# Altium PCB MASTER.PcbDoc
Units mm, origin at the board's own origin, x right, y up, seen from the top; angles counter-clockwise.
Board outline 65.41 x 68.71 mm, 2 copper layers (Top Layer, Bottom Layer); 58 components, 43 nets, 233 pads, 0 vias.
Unrouted connection lines stored in the file: 136.
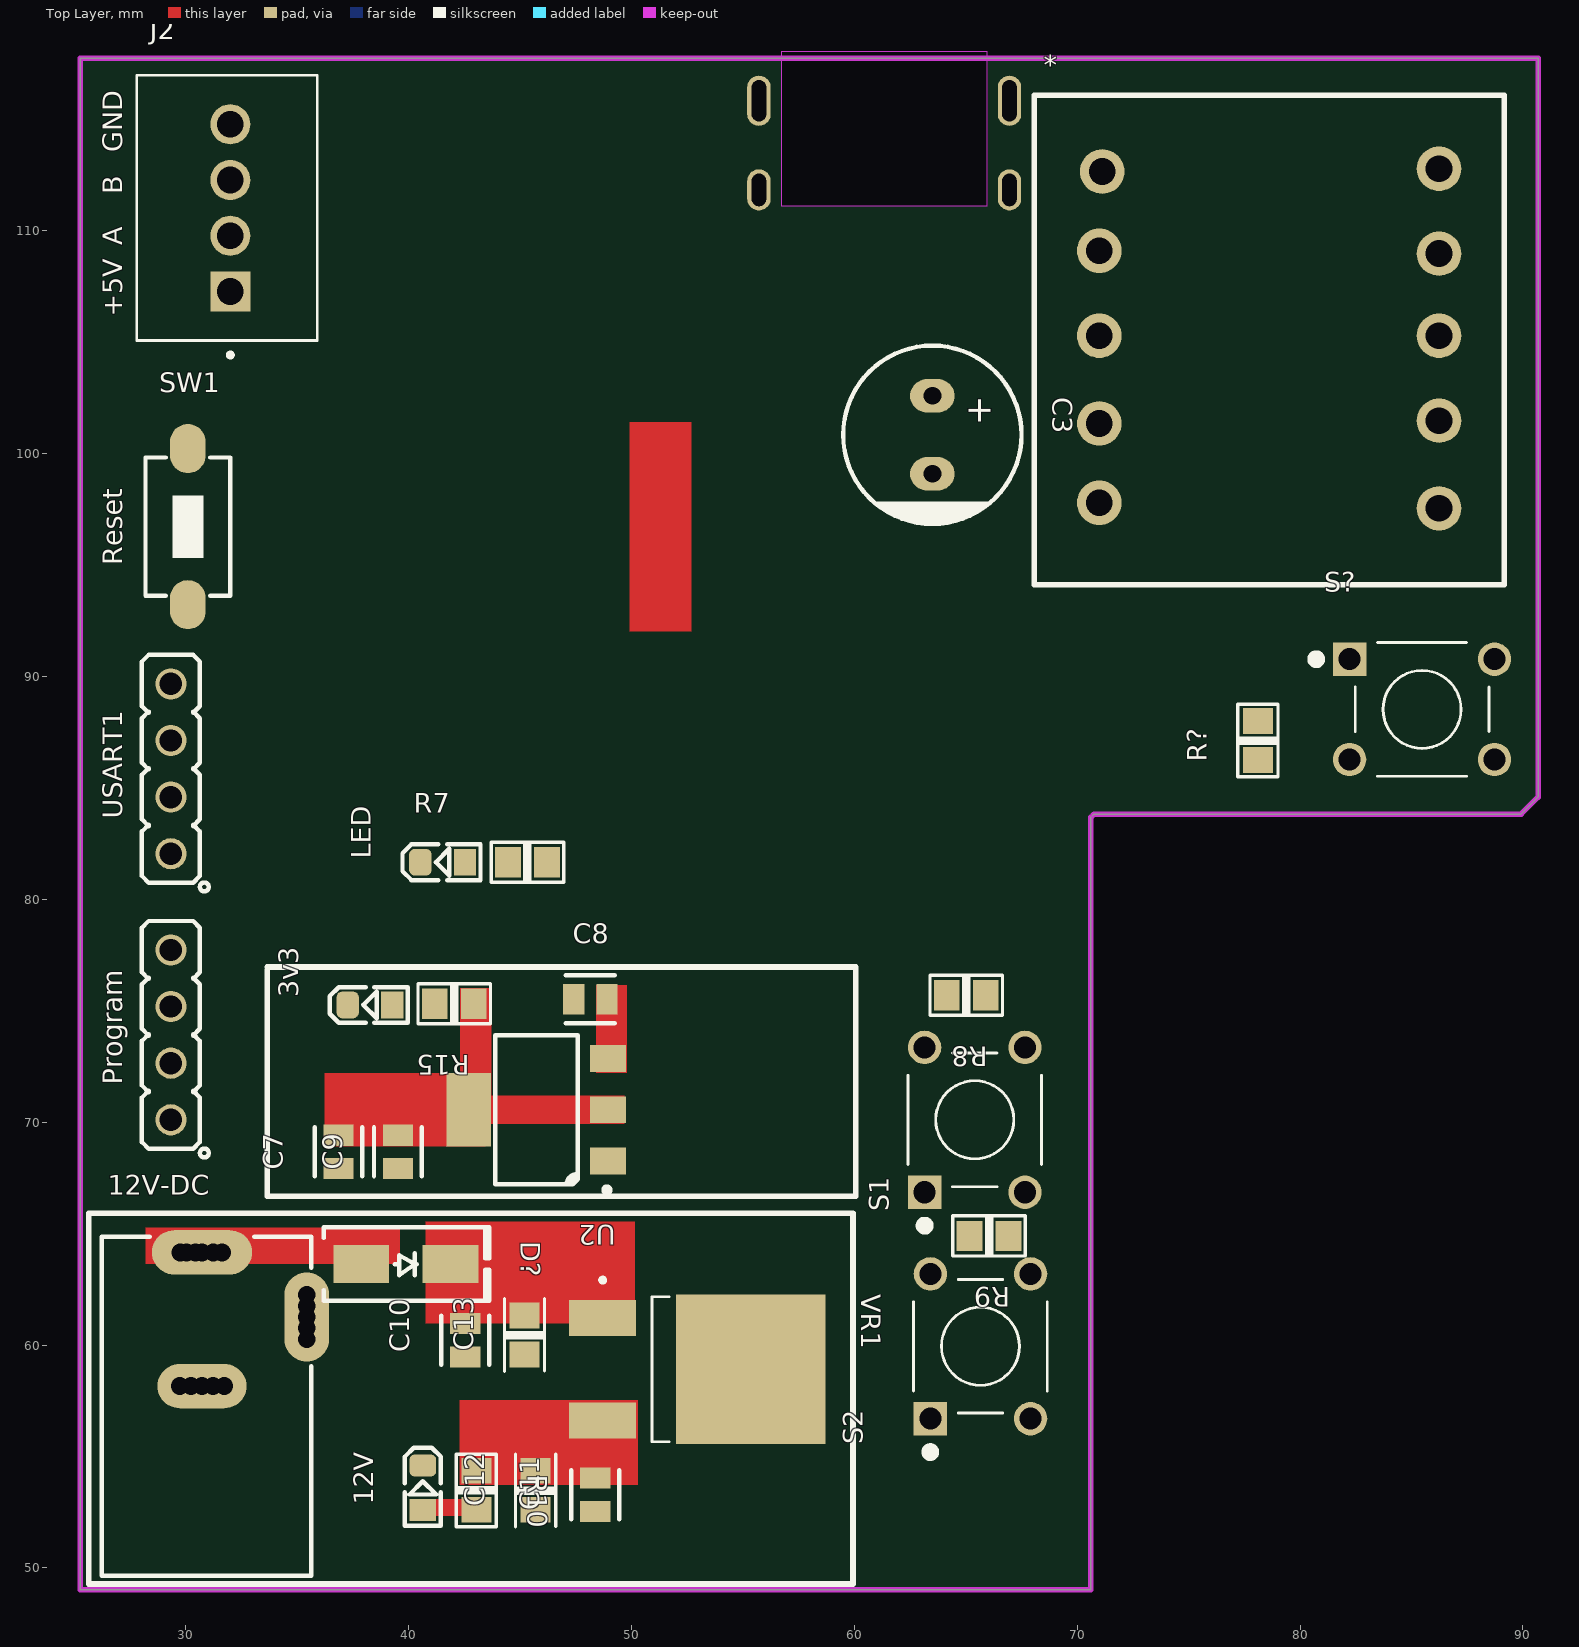
[diagram p0: Top Layer view]
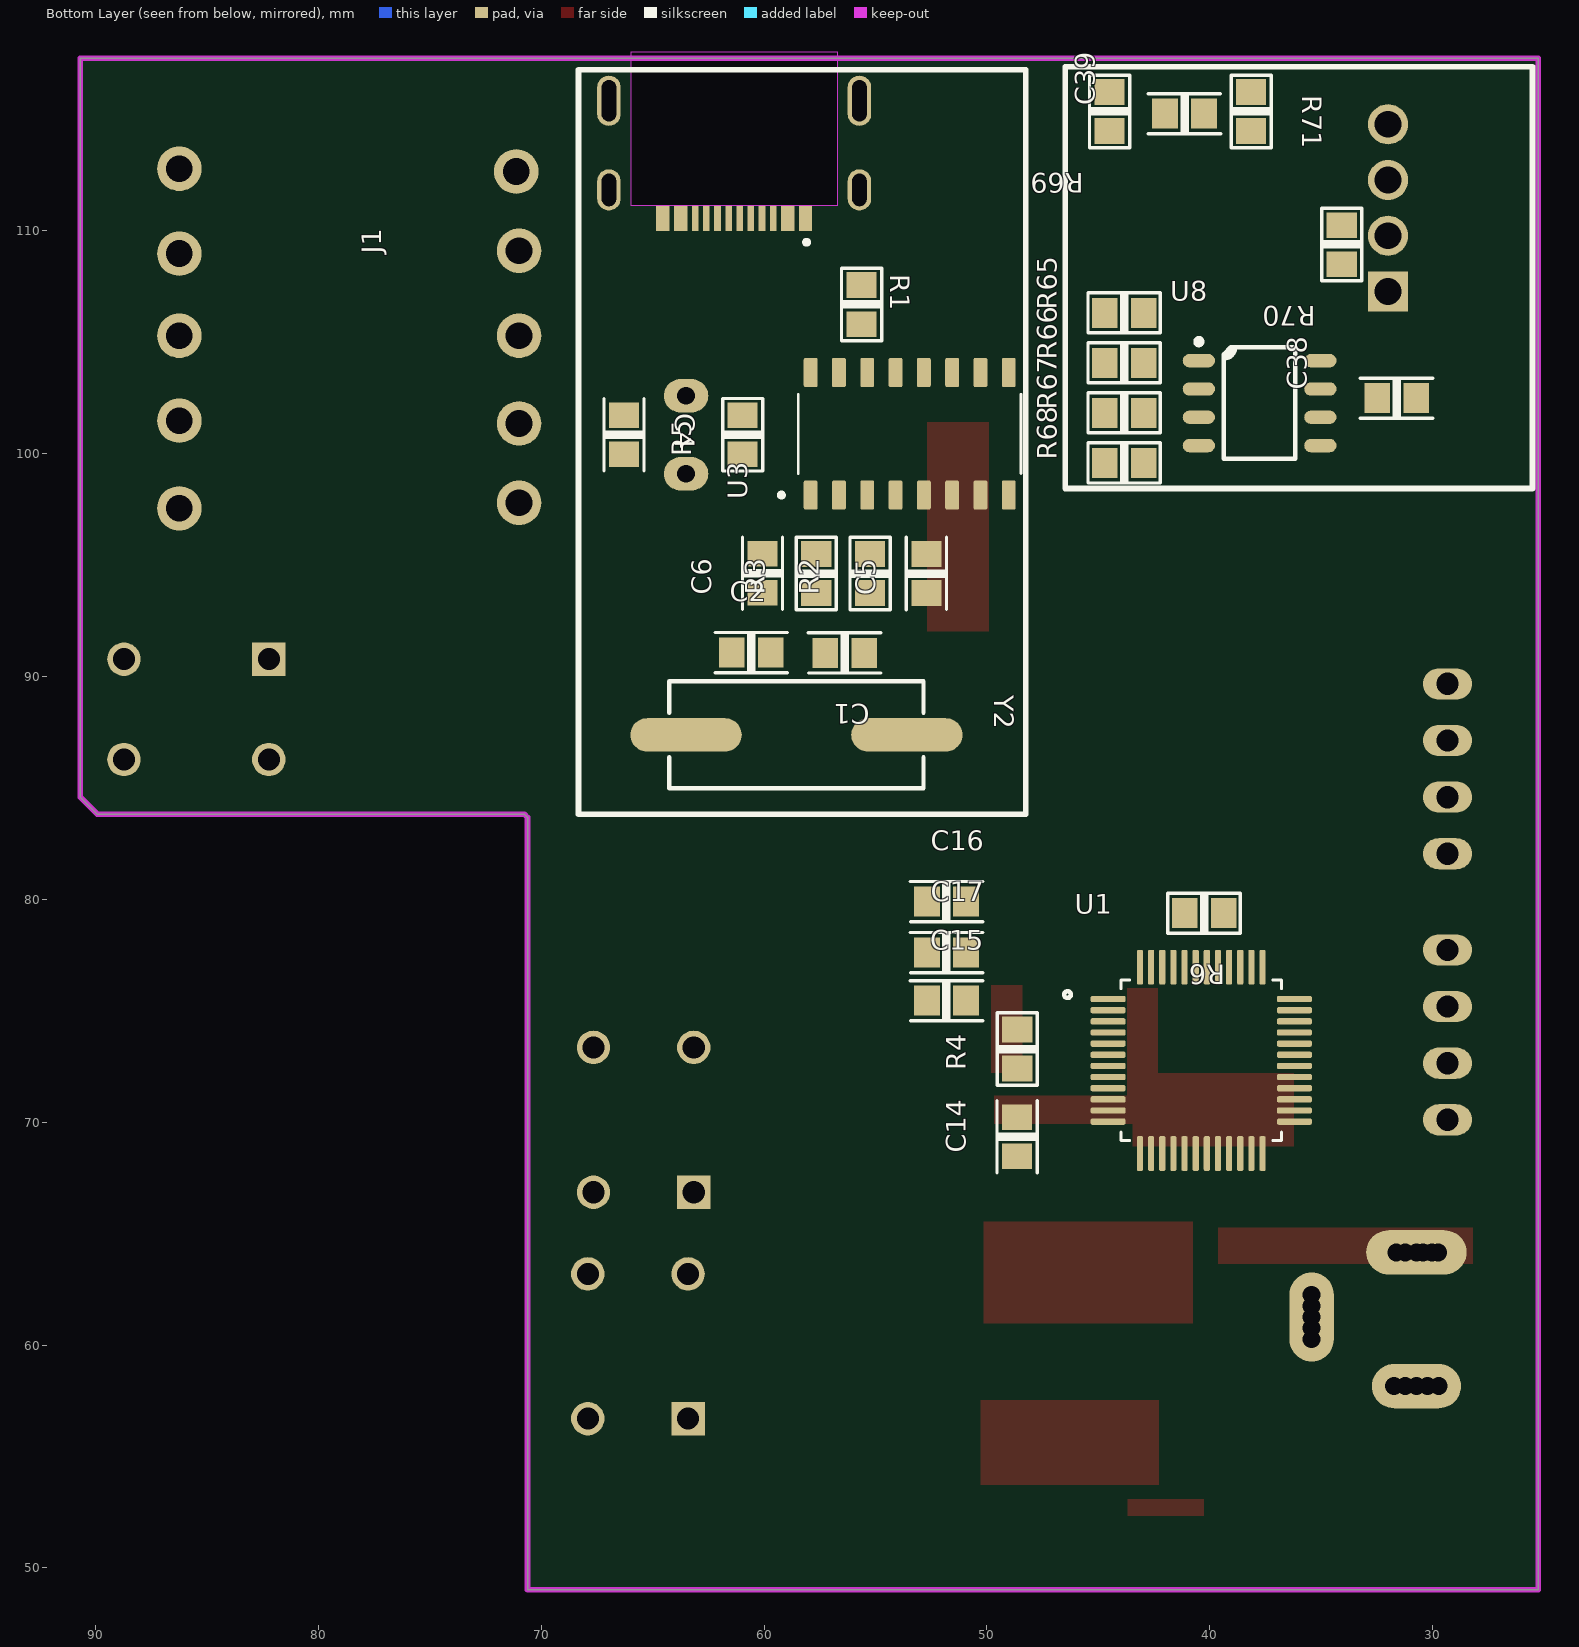
[diagram p1: Bottom Layer view, seen from below]

## Layer stack, top to bottom
Top Solder: solder mask 0.0102, Solder Resist, Dk 3.5
Top Layer: signal copper 0.0356
Dielectric 1: dielectric 0.32, FR-4, Dk 4.8
Bottom Layer: signal copper 0.0356
Bottom Solder: solder mask 0.0102, Solder Resist, Dk 3.5

## Board outline
25.273,49.022 25.273,117.729 90.678,117.729 90.678,84.582 89.916,83.82 70.761,83.82 70.612,83.671 70.612,49.022

## Design rules (kind name [scope] priority, off if disabled: settings)
Clearance [All] p1: gap=0.254 ignorepadtopadclearanceinfootprint=TRUE except(0: Arc-Hole Track-Hole SMDPad-Hole THPad-Hole Via-Hole Fill-Hole Poly-Hole Region-Hole Text-Hole)
PolygonConnect [All] p1: connectstyle=Relief reliefconductorwidth=0.254 reliefentries=4 polygonreliefangle="90 Angle" airgapwidth=0.254
RoomDefinition MAX485 [InComponentClass('MAX485')] p1: confinementstyle=ConfineIn formatcopy=TRUE lockcomponents=FALSE outline 46.228,117.753 25.668,117.753 25.668,98.35 46.228,98.35
RoomDefinition "Supply 12V to 5V-7805 smd" [InComponentClass('Supply 12V to 5V-7805 smd')] p2: confinementstyle=ConfineIn formatcopy=TRUE lockcomponents=FALSE outline 59.944,65.786 25.273,65.786 25.273,49.022 59.944,49.022
RoomDefinition CH340G [InComponentClass('CH340G')] p3: confinementstyle=ConfineIn formatcopy=TRUE lockcomponents=FALSE outline 47.752,117.745 47.752,83.693 68.316,83.693 68.316,117.745
RoomDefinition "Supply 5V to 3V3- Ams1117" [InComponentClass('Supply 5V to 3V3- Ams1117')] p4: confinementstyle=ConfineIn formatcopy=TRUE lockcomponents=FALSE outline 50.345,76.92 33.556,76.92 33.556,66.506 50.345,66.506
RoutingVias [All] p1: holewidth=0.711 width=1.27 viastyle="Through Hole" minholewidth=0.711 minwidth=1.27 maxholewidth=0.711 maxwidth=1.27
SolderMaskExpansion [All] p1: expansion=0.102 istentingtop=FALSE
Width [All] p1: maxlimit=0.254 minlimit=0.254 preferedwidth=0.254
30 further rules are at their usual default settings.

## Classes and differential pairs
component class "Supply 12V to 5V-7805 smd": 12V 12V-DC C10 C11 C12 C13 D? R10 VR1
component class "Supply 5V to 3V3- Ams1117": 3v3 C7 C8 C9 R15 U2
component class Micro: * C14 C15 C16 C17 LED Program R4 R6 R7 R8 R9 R? S1 S2 S? SW1 U1 USART1
component class MAX485: C38 C39 J2 R65 R66 R67 R68 R69 R70 R71 U8
component class CH340G: C1 C2 C3 C4 C5 C6 J1 R1 R2 R3 R5 U3 Y2

## Components (designator, comment, footprint, x,y, rotation, side; value= is the part's Value field where it differs from the comment)
3v3 "LED SMD 0805 GREEN" LED_0805_GREEN 38.271,75.257 r180 top
12V "LED SMD 0805 GREEN" LED_0805_GREEN 40.64,53.594 r90 top
12V-DC "Power Jack" DC005 30.734,49.657 r90 top
* "7seg" PCBComponent_1 68.707,94.615 r0 top
C1 "22pF" "CAP 0805_2012" 56.388,91.059 r0 bottom value=100nF
C2 "22pF" "CAP 0805_2012" 60.579,91.059 r180 bottom value=100nF
C3 "10uF 6.3V" "CAP ALTH D8 L3.5 H12.5" 63.5,100.838 r270 top
C4 "100nF" "CAP 0805_2012" 66.294,100.838 r270 bottom
C5 "100nF" "CAP 0805_2012" 52.705,94.615 r90 bottom
C6 "100nF" "CAP 0805_2012" 60.061,94.629 r90 bottom
C7 "10uF" FP-C0805C-DN-MFG 36.858,68.665 r90 top value="0.22 μF"
C8 "10uF" FP-C0805C-DN-MFG 48.161,75.511 r0 top value="0.22 μF"
C9 "100nF" FP-C0805C-DN-MFG 39.525,68.665 r90 top value="0.22 μF"
C10 "10uF" FP-C0805C-DN-MFG 42.545,60.21 r90 top value="0.22 μF"
C11 "10uF" FP-C0805C-DN-MFG 48.375,53.278 r90 top value="0.22 μF"
C12 "100nF" "CAP 0805_2012" 45.708,53.477 r90 top
C13 "100nF" "CAP 0805_2012" 45.212,60.452 r90 top
C14 "100nF" "CAP 0805_2012" 48.641,69.342 r90 bottom
C15 "100nF" "CAP 0805_2012" 51.816,75.438 r180 bottom
C16 "100nF" "CAP 0805_2012" 51.816,79.883 r180 bottom
C17 "100nF" "CAP 0805_2012" 51.816,77.597 r180 bottom
C38 "10uF" "CAP 0805_2012" 31.623,102.489 r0 bottom value=100nF
C39 "100nF" "CAP 0805_2012" 41.138,115.253 r0 bottom
D? "SS14" "DO-214AC SMA" 39.878,63.627 r0 top
J1 "2340901-1" TE_2340901-1 61.341,115.824 r0 bottom
J2 "1881574" PHOENIX_1881574 35.904,105.068 r90 top
LED "LED SMD 0805 GREEN" LED_0805_GREEN 41.529,81.661 r180 top
Program "HDR1X4" HDR_1X4 29.337,73.914 r90 top value=HDRM4
R1 "5.1K" "RES 0805_2012" 55.626,106.68 r270 bottom value=1K
R2 "1K" "RES 0805_2012" 55.245,94.615 r90 bottom
R3 "1K" "RES 0805_2012" 57.658,94.615 r90 bottom
R4 "10K" "RES 0805_2012" 48.641,73.279 r90 bottom value=1K
R5 "5.1K" "RES 0805_2012" 60.96,100.838 r90 bottom value=1K
R6 "10K" "RES 0805_2012" 40.259,79.375 r0 bottom value=1K
R7 "330" "RES 0805_2012" 45.339,81.661 r0 top value=1K
R8 "10K" "RES 0805_2012" 65.024,75.692 r180 top value=1K
R9 "10K" "RES 0805_2012" 66.04,64.897 r180 top value=1K
R10 "1K" "RES 0805_2012" 43.041,53.479 r270 top
R15 "330" "RES 0805_2012" 42.051,75.311 r180 top value=1K
R65 "10k" "RES 0805_2012" 43.843,106.309 r0 bottom value=1K
R66 "10k" "RES 0805_2012" 43.843,104.065 r0 bottom value=1K
R67 "10k" "RES 0805_2012" 43.843,101.822 r0 bottom value=1K
R68 "10k" "RES 0805_2012" 43.843,99.578 r0 bottom value=1K
R69 "20k" "RES 0805_2012" 44.498,115.34 r270 bottom value=1K
R70 "120" "RES 0805_2012" 34.084,109.371 r270 bottom value=1K
R71 "20k" "RES 0805_2012" 38.148,115.34 r270 bottom value=1K
R? "10K" "RES 0805_2012" 78.105,87.122 r90 top value=1K
S1 "FSM8JH" SW_FSM8JH 65.405,70.104 r90 top
S2 "FSM8JH" SW_FSM8JH 65.659,59.944 r90 top
S? "FSM8JH" SW_FSM8JH 85.471,88.519 r0 top
SW1 "Tactile 2PIN 6X3.5mm H4.57mm (SMD)" SWPBS_SPST_6X3X5 30.099,96.718 r90 top
U1 "STM32F103C8T6" QFP50P900X900X160-48N 40.386,72.771 r180 bottom
U2 "LD1117-3.3V" "SOT-223-4 6.5X7MM P2.3MM" 45.748,70.558 r180 top
U3 "CH340G" SOIC127P600X180-16N 53.467,100.882 r90 bottom
U8 "ADM485" "SOIC-8 4.9X3.9MM P1.27MM" 37.767,102.259 r180 bottom
USART1 "HDR1X4" HDR_1X4 29.337,85.852 r90 top value=HDRM4
VR1 "L78M12ABDT" VREG_L78M12ABDT 52.959,58.912 r0 top
Y2 "12MHz" "HC-49S SMD" 58.547,87.376 r180 bottom

## Footprints (in the part's own frame and the unit in brackets; to place one, negate y for a bottom-side part, rotate by r counter-clockwise, add the part's x,y. Pads: shape width x height; smd on the part's side, far side on the other; paste and mask are expansions set on the pad)
"CAP 0805_2012" [mm] "Chip Capacitor, 2-Leads, Body 2.00x1.20mm, IPC Medium Density"
  rect 1.15x1.35 smd: 1(-0.875,0.01) 2(0.875,0.01)
  silkscreen extent -1.62,-0.89 1.63,0.91, body extent -0.99,-0.65 1.01,0.62, height 1.26
"CAP ALTH D8 L3.5 H12.5" [mm] "8MM Diameter, 3.5MM Lead Spacing Aluminium Capacitor"
  oval 1.5x2 hole 0.8: 1(-1.75,0) 2(1.75,0)
  silkscreen extent -4,-4 4,4, body extent -4,-4 4,4, height 11.5
DC005 [mm] "Power Adaptor Jack"
  round 1.5 hole 0.8: 1(14.5,-0.902) 1(14.5,-0.502) 1(14.5,0.298) 1(14.5,0.698) 1(14.5,0.978) 2(8.5,-1) 2(8.5,1) 2(8.5,-0.5) 2(8.5,0.5) 3(10.6,-4.7) 3(11.1,-4.7) 3(12.1,-4.7) 3(12.6,-4.7)
  oval 2x4.5 hole 0.8: 1(14.5,0)
  oval 2x4 hole 0.8: 2(8.5,0)
  oval 4x2 hole 0.8: 3(11.6,-4.7)
  silkscreen extent 0,-4.9 15.2,4.5, body extent -0.11,-4.7 15.09,4.7, height 11.1
"DO-214AC SMA" [mm] "Molded Diode, 2-Leads, Body 4.30x2.60mm, IPC Medium Density"
  rect 2.5x1.7 smd: 1(-2,0) 2(2,0)
  Top Layer pour cut-out: -1.905,1.397 2.159,1.397 2.159,-1.524 -1.905,-1.524
  silkscreen extent -3.68,-1.65 3.75,1.65, body extent -2.6,-1.37 2.6,1.37, height 2.4
FP-C0805C-DN-MFG [mm]
  rect 0.95x1.35 smd paste+0 mask+0: 1(-0.75,0) 2(0.75,0)
  silkscreen extent -1.1,-1.07 1.1,1.07, body extent -1,-0.62 1,0.63, height 0.88
"HC-49S SMD" [mm] "SMD crystal resonator, ABL, ABLS, HC-49, HC49 11X4.5MM"
  oval 5x1.5 smd: 1(-4.953,0) 2(4.953,0)
  Top Layer pour cut-out: -5.715,1.524 5.715,1.524 5.715,-1.778 5.588,-1.651 -5.715,-1.651
  silkscreen extent -5.7,-2.4 5.7,2.4, body extent -6.4,-2.41 6.4,2.41, height 4.3
HDR_1X4 [mm] "Connector; Header; 4 Position"
  round 1.4 / inner round 1.4 / far side oval 1.4x2.2 hole 1 mask+0.1: 1(-3.81,0) 2(-1.27,0) 3(1.27,0) 4(3.81,0)
  silkscreen extent -5.5,-1.7 5.11,1.3
LED_0805_GREEN [mm] "LED SMD 0805, GREEN"
  rect 1x1.2 smd mask+0.075: 1(-1,0)
  rrect50% 1x1.2 smd mask+0.075: 2(1,0)
  Top Layer pour cut-out: -0.5,0.8 0.5,0.8 0.5,-0.8 -0.5,-0.8
  silkscreen extent -1.7,-0.8 1.8,0.8, body extent -1,-0.63 1,0.63, height 0.7
PCBComponent_1 [mm]
  round 2 hole 1.2: 1(2.413,18.034) 2(2.286,14.478) 3(2.286,10.668) 4(2.286,6.731) 5(2.286,3.175) 6(17.526,2.921) 7(17.526,6.858) 8(17.526,10.668) 9(17.526,14.351) 10(17.526,18.161)
  silkscreen extent -0.64,-0.51 20.45,21.46, body extent -0.7,-0.41 20.52,21.59, height 16.61
PHOENIX_1881574 [mm]
  rect 1.8x1.8 / inner round 1.8 / far side rect 1.8x1.8 hole 1.2: 01(2.2,3.9)
  round 1.8 hole 1.2: 02(4.7,3.9) 03(7.2,3.9) 04(9.7,3.9)
  silkscreen extent -0.75,0 11.9,8.1
QFP50P900X900X160-48N [mm]
  rrect50% 1.56x0.28 smd: 1(-4.18,2.75) 2(-4.18,2.25) 3(-4.18,1.75) 4(-4.18,1.25) 5(-4.18,0.75) 6(-4.18,0.25) 7(-4.18,-0.25) 8(-4.18,-0.75) 9(-4.18,-1.25) 10(-4.18,-1.75) 11(-4.18,-2.25) 12(-4.18,-2.75) 25(4.18,-2.75) 26(4.18,-2.25) 27(4.18,-1.75) 28(4.18,-1.25) 29(4.18,-0.75) 30(4.18,-0.25) 31(4.18,0.25) 32(4.18,0.75) 33(4.18,1.25) 34(4.18,1.75) 35(4.18,2.25) 36(4.18,2.75)
  rrect50% 0.28x1.56 smd: 13(-2.75,-4.18) 14(-2.25,-4.18) 15(-1.75,-4.18) 16(-1.25,-4.18) 17(-0.75,-4.18) 18(-0.25,-4.18) 19(0.25,-4.18) 20(0.75,-4.18) 21(1.25,-4.18) 22(1.75,-4.18) 23(2.25,-4.18) 24(2.75,-4.18) 37(2.75,4.18) 38(2.25,4.18) 39(1.75,4.18) 40(1.25,4.18) 41(0.75,4.18) 42(0.25,4.18) 43(-0.25,4.18) 44(-0.75,4.18) 45(-1.25,4.18) 46(-1.75,4.18) 47(-2.25,4.18) 48(-2.75,4.18)
  silkscreen extent -6.15,-3.6 3.6,3.6, body extent -4.5,-4.5 4.5,4.5, height 1.6
"RES 0805_2012" [mm] "Chip Resistor, 2-Leads, Body 2.00x1.25mm, IPC Medium Density"
  rect 1.15x1.35 smd: 1(-0.875,0) 2(0.875,0)
  silkscreen extent -1.62,-0.9 1.63,0.9, body extent -0.95,-0.62 1.05,0.63, height 0.6
SOIC127P600X180-16N [mm]
  rrect25% 1.31x0.62 smd: 1(-2.75,4.445) 2(-2.75,3.175) 3(-2.75,1.905) 4(-2.75,0.635) 5(-2.75,-0.635) 6(-2.75,-1.905) 7(-2.75,-3.175) 8(-2.75,-4.445) 9(2.75,-4.445) 10(2.75,-3.175) 11(2.75,-1.905) 12(2.75,-0.635) 13(2.75,0.635) 14(2.75,1.905) 15(2.75,3.175) 16(2.75,4.445)
  silkscreen extent -2.85,-5 1.78,5.85, body extent -3,-5 3,5, height 1.8
"SOIC-8 4.9X3.9MM P1.27MM" [mm] "SOIC, 8-Leads, Body 4.90x3.90mm, Pitch 1.27mm, IPC Medium Density"
  oval 1.45x0.6 smd: 1(-2.725,1.905) 2(-2.725,0.635) 3(-2.725,-0.635) 4(-2.725,-1.905) 5(2.725,-1.905) 6(2.725,-0.635) 7(2.725,0.635) 8(2.725,1.905)
  silkscreen extent -2.85,-2.5 1.6,2.88, body extent -3.01,-2.45 3.01,2.45, height 1.5
"SOT-223-4 6.5X7MM P2.3MM" [mm] "SOT223, 4-Leads, Body 6.50x7.00mm (avg), Pitch 2.30mm, IPC Medium Density"
  rect 1.6x1.2 smd: 1(-3.2,2.3) 2(-3.2,0) 3(-3.2,-2.3)
  rect 2x3.3 smd: 4(3.048,0)
  silkscreen extent -3.27,-3.35 1.85,3.72, body extent -3.52,-3.25 3.5,3.25, height 1.8
SW_FSM8JH [mm]
  rect 1.498x1.498 / inner round 1.498 / far side rect 1.498x1.498 hole 0.99: 1(-3.25,2.25)
  round 1.498 hole 0.99: 2(-3.25,-2.25) 3(3.25,2.25) 4(3.25,-2.25)
  silkscreen extent -4.95,-3 3,3, body extent -3,-3.95 3,3.95, height 9.5
SWPBS_SPST_6X3X5 [mm] "SWITCH, PUSHBUTTON, SMD, SPST, 6X3.5mm, SKQMBBE010, 50000 Cycles, 1.57N Force"
  oval 2.2x1.6 smd mask+0.1: 1(-3.5,0) 2(3.5,0)
  silkscreen extent -3.1,-1.9 3.1,1.9, body extent -3.65,-1.75 3.65,1.75, height 5
TE_2340901-1 [mm]
  rect 0.6x1.15 smd: A1/B12(-3.2,5.275) A4/B9(-2.4,5.275) B1/A12(3.2,5.275) B4/AP(2.4,5.275)
  rect 0.3x1.15 smd: A5(-1.25,5.275) A6(-0.25,5.275) A7(0.25,5.275) A8(1.25,5.275) B5(1.75,5.275) B6(0.75,5.275) B7(-0.75,5.275) B8(-1.75,5.275)
  oval 1.05x1.85 hole 0.65 slot 1.45 at 90 deg: SH1(-5.62,4) SH2(5.62,4)
  oval 1.05x2.25 hole 0.65 slot 1.85 at 90 deg: SH3(-5.62,0) SH4(5.62,0)
  Keep-Out Layer board cut-out: -4.62,-2.2 -4.62,4.7 4.62,4.7 4.62,-2.2
  silkscreen extent -3.35,6.25 -3.15,6.45, body extent -5.77,0 5.77,7.55, height 1.58
VREG_L78M12ABDT [mm]
  rect 3x1.6 smd: 1(-4.25,2.3) 3(-4.25,-2.3)
  rect 6.7x6.7 smd paste-2.645: 2(2.4,0)
  silkscreen extent -4.35,-3.25 -1.26,4.1, body extent -4.86,-3.25 4.86,3.25, height 2.4

## Part data
12V-DC: PartNumber=DC005-5.5MM
*: "file:///C:/Users/Tamana/Downloads/7SEG-12-19mm-GREEN-ANOD.pdf"
C1 C2 C4 C5 C6 C14 C15 C16 C17 C38 C39: library part "Cap 0805", "SMT Capacitor"
C3: library part "Cap Alu TH D8mm L3.5mm H12.5mm", "TH Aluminum Polymer Capacitor"
C7 C8 C9 C10 C11: library part CMP-1036-04552-2, "CAP CER 0.22UF 50V X7R 0805", Capacitance="0.22 μF", Manufacturer=KEMET, Manufacturer Part Number=C0805C224K5RACTU, Package=C0805C-DN, Temperature="-55°C to +125°C", Temperature Characteristic=X7R, Temperature Coefficient=30ppm/°C, Temperature Range High=+125°C, Temperature Range Low=-55°C, Tolerance=0.1, Voltage Rating="50 V", Automotive=No, Category=Cap, ComponentLink2Description=Datasheet, ComponentLink2URL=https://content.kemet.com/datasheets/KEM_C1003_C0G_SMD.pdf, Device Class L1="Passive Components", Device Class L2=Capacitors, Device Class L3="Ceramic Capacitors", Digikey Description="CAP CER 0.22UF 50V X7R 0805", Height=0.88mm, Ipc Land Pattern Name=CAPC200125X78, Lead Free=Yes, Material=Ceramic, Mouser Description="CAP CER 0.22UF 50V X7R 0805", Octopart=https://octopart.com/c0805c224k5ractu-kemet-144670, RoHS=TRUE
C12 C13: library part LD051C182KAB2A, "COMMERCIAL CHIP STD JAPAN BULK - FN TAPE/REEL, 7 INCH PAPER TAPE", Package=None, Availability=Unavailable, MP=LD051C182KAB2A, Price=None
D?: library part "SS14 (SMD SMA)", "Diode Schottky 40V 1A Surface Mount SMA (DO-214AC)", PartNumber=SS14
J1: "USB Type C 2.0 Conn Rec Mid-Mount One Ro", Package=None, Check_prices=https://www.snapeda.com/parts/2340901-1/TE+Connectivity/view-part/?ref=eda, MF="TE Connectivity", MP=2340901-1, SnapEDA_Link=https://www.snapeda.com/parts/2340901-1/TE+Connectivity/view-part/?ref=snap
J2: Package=None, Availability=Unavailable, MF="{'manufacturer': u'Phoenix Contact'}", MP=1881574, Price=None
Program USART1: library part HDR_1X4, "CONN, HEADER, Male, pitch: 2.54mm, 4POS"
R1 R2 R3 R4 R5 R6 R7 R8 R9 R10 R15 R65 R66 R67 R68 R69 R70 R71 R?: library part "Res 0805", "SMT Resistor"
S1 S2 S?: "Tactile Switch SPST-NO Top Actuated Through Hole", Package=None, Availability="In Stock", Check_prices=https://www.snapeda.com/parts/FSM8JH/TE+Connectivity+ALCOSWITCH+Switches/view-part/?ref=eda, MF="TE Connectivity", MP=FSM8JH, Price=None, SnapEDA_Link=https://www.snapeda.com/parts/FSM8JH/TE+Connectivity+ALCOSWITCH+Switches/view-part/?ref=snap
SW1: "Tactile Switch SPST-NO Top Actuated Surface Mount", PartNumber=FSMSMTR-ND
U1: "ARM® Cortex®-M3 STM32F1 Microcontroller IC 32-Bit 72MHz 64KB (64K x 8) FLASH 48-LQFP (7x7)", Package="LQFP-48 STMicroelectronics", Check_prices=https://www.snapeda.com/parts/STM32F103C8T6/STMicroelectronics/view-part/?ref=eda, MF=STMicroelectronics, MP=STM32F103C8T6, SnapEDA_Link=https://www.snapeda.com/parts/STM32F103C8T6/STMicroelectronics/view-part/?ref=snap
U2: library part "LD1117-3.3V (SMD SOT-223)", "Linear Voltage Regulator IC  1 Output  800mA SOT-223", PartNumber=LD1117S33CTR
U3: "USB Interface Integrated Circuit", Package=None, Availability="Not in stock", Check_prices=https://www.snapeda.com/parts/Ch340G/WCH/view-part/?ref=eda, MF=WCH, MP=Ch340G, Price=None, SnapEDA_Link=https://www.snapeda.com/parts/Ch340G/WCH/view-part/?ref=snap
U8: library part "ADM485 (SMD)", "RS485 Interface", PartNumber=ADM4853ARZ-REEL7
VR1: "Linear Voltage Regulator IC Positive Fixed 1 Output 500mA DPAK", Package="TO-252 STMicroelectronics", Availability="Not in stock", Check_prices=https://www.snapeda.com/parts/L78M12ABDT/STMicroelectronics/view-part/?ref=eda, MF=STMicroelectronics, MP=L78M12ABDT, Price=None, SnapEDA_Link=https://www.snapeda.com/parts/L78M12ABDT/STMicroelectronics/view-part/?ref=snap
Y2: library part "Crystal HC-49S SMD 8MHz", "SMT Crystal", PartNumber=ABLS-8.000MHZ-K4T

## Nets (pads, with @x,y where several pads share a name; then routed paths per layer and width w, separated by ;. In a path a pad name is that pad's centre, name@x,y a point inside that pad or via, vN(x,y) a via of type N, cw(c..) or ccw(c..) an arc to the next point about the centre after c; other vN are vias at no path point)
3v3: C7.2 C9.2 C15.2 C16.2 C17.2 Program.1 R4.2 R8.2 R9.2 R15.1 R?.2 U1.24 U1.36 U1.48 U2.2 U2.4 USART1.1
+5: J1.B4/AP
+12: C10.2 C13.2 D?.2 VR1.1
a: *.7 U1.39
b: *.6 U1.40
c: *.4 U1.41
com: *.3 *.8 U1.22
d: *.2 U1.42
D+: J1.A6 J1.B6 U3.5
D-: J1.A7 J1.B7 U3.6
DP: *.5 U1.21
e: *.1 U1.43
f: *.9 U1.45
g: *.10 U1.46
GND: 3v3.2 12V-DC.2 12V-DC.3 12V.2 C1.2 C2.2 C3.2 C4.2 C5.1 C7.1 C8.1 C9.1 C10.1 C11.1 C12.1 C13.1 C14.1 C15.1 C16.1 C17.1 C38.2 C39.2 J1.A1/B12 J1.B1/A12 J1.SH1 J1.SH2 J1.SH3 J1.SH4 J2.04 LED.2 Program.4 R1.1 R5.1 R6.1 R71.1 S1.3 S1.4 S2.3 S2.4 S?.3 S?.4 SW1.1 U1.23 U1.35 U1.47 U2.1 U3.1 U8.5 USART1.4 VR1.2
INC: R?.1 S?.1 S?.2 U1.18
Net3v3_1: 3v3.1 R15.2
Net12V-DC_1: 12V-DC.1 D?.1
Net12V_1: 12V.1 R10.2
NetC3_1: C3.1 C4.1 C8.2 C11.2 C12.2 C38.1 C39.1 J1.A4/B9 J2.01 R10.1 R65.2 R66.2 R67.2 R68.2 R69.2 U2.3 U3.16 U8.8 VR1.3
NetC5_2: C5.2 U3.4
NetC6_2: C6.2 U3.13
NetJ1_A5: J1.A5 R1.2
NetJ1_B5: J1.B5 R5.2
NetJ2_02: J2.02 R69.1 R70.2 U8.6
NetJ2_03: J2.03 R70.1 R71.2 U8.7
NetLED_1: LED.1 R7.2
NetR2_2: R2.2 U3.3
NetR3_2: R3.2 U3.2
NetR6_2: R6.2 U1.44
NetR7_1: R7.1 U1.19
NetR8_1: R8.1 S1.1 S1.2 U1.20
NetR9_1: R9.1 S2.1 S2.2 U1.26
NetR66_1: R66.1 R67.1 U1.32 U8.2 U8.3
NRST: C6.1 C14.2 R4.1 SW1.2 U1.7
RX: R65.1 U1.31 U8.1
RXD: R3.1 U1.13 USART1.3
SWCLK: Program.3 U1.37
SWDIO: Program.2 U1.34
TX: R68.1 U1.30 U8.4
TXD: R2.1 U1.12 USART1.2
XI: C1.1 U3.7 Y2.2
XO: C2.1 U3.8 Y2.1
pads on no net: J1.A8 J1.B8 U1.1 U1.2 U1.3 U1.4 U1.5 U1.6 U1.8 U1.9 U1.10 U1.11 U1.14 U1.15 U1.16 U1.17 U1.25 U1.27 U1.28 U1.29 U1.33 U1.38 U3.9 U3.10 U3.11 U3.12 U3.14 U3.15

## Keep-outs
Keep-Out Layer:
  the board outline again, w0.254

## Other copper
Top Layer:
  region net NetC3_1: 49.812,76.146 48.415,76.146 48.415,72.209 49.812,72.209
  region net 3v3: 43.716,76.019 42.319,76.019 42.319,70.177 43.716,70.177
  region net 3v3: 43.462,72.209 36.223,72.209 36.223,68.907 43.462,68.907
  region net 3v3: 49.685,71.193 41.811,71.193 41.811,69.923 49.685,69.923
  rectangle net Net12V_1: 40.259,52.324 43.688,53.086
  rectangle net NetC3_1: 42.291,53.721 50.292,57.531
  rectangle net +12: 40.767,60.96 50.165,65.532
  rectangle net Net12V-DC_1: 28.194,63.627 39.624,65.278
  region net +12: 52.697,92.009 52.697,101.407 49.903,101.407 49.903,92.009

## Silkscreen, mask and mechanical layers (free items; w line width, h text height)
Top Overlay:
  lines w0.254: 33.655,76.835 33.655,66.675 60.071,66.675 60.071,76.962 33.655,76.962 ; 25.654,49.276 59.944,49.276 59.944,65.913 25.654,65.913 25.654,49.276
  text "GND" at 27.447,113.503 h1.52 r90
  text "B" at 27.447,111.633 h1.52 r90
  text "A" at 27.447,109.332 h1.52 r90
  text "+5V" at 27.447,106.126 h1.52 r90
  text "Reset" at 27.447,94.977 h1.52 r90
Bottom Overlay:
  lines w0.254: 25.527,98.425 46.482,98.425 46.482,117.348 25.527,117.348 25.527,98.425 ; 48.26,83.82 48.26,117.221 68.326,117.221 68.326,83.82 48.26,83.82

## Text inside footprints (layer, text, board x,y; h text height)
C3: Top Overlay "+" at 64.75,102.588 h2 r270
J1: Mechanical 13 "PCB EDGE" at 68.834,117.602 h1.02 r180